# Altium PCB LSS-P-PCB-S v1.1.PcbDoc
Units mil, origin at the board's own origin, x right, y up, seen from the top; angles counter-clockwise.
Board outline 571.53 x 787.66 mil, 2 copper layers (Top Layer, Bottom Layer), stack 57 mil thick; 2 components, 4 nets, 16 pads, 5 vias.
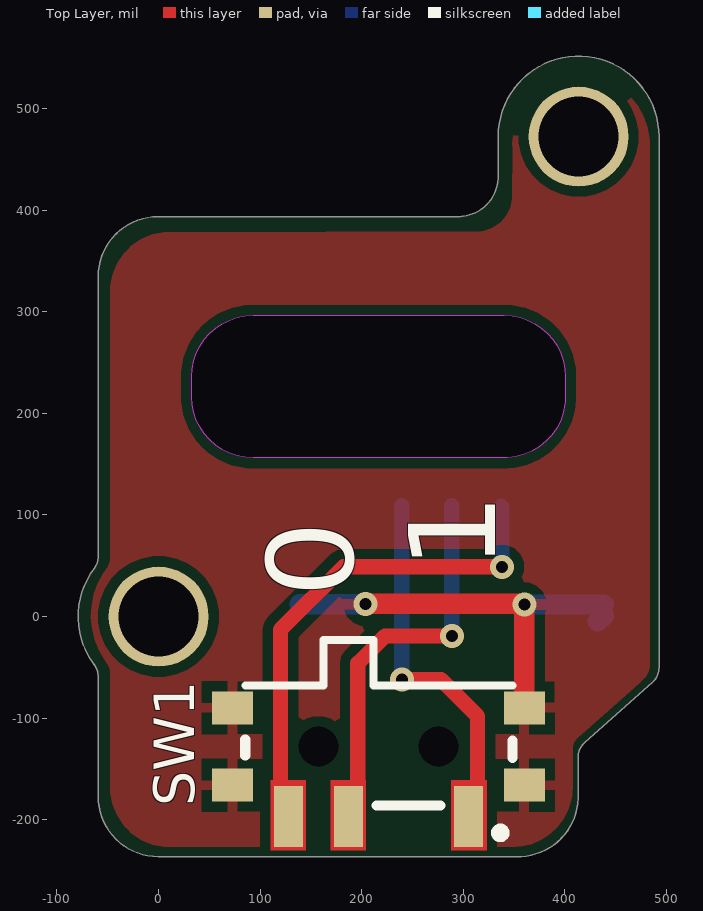
[diagram p0: Top Layer view]
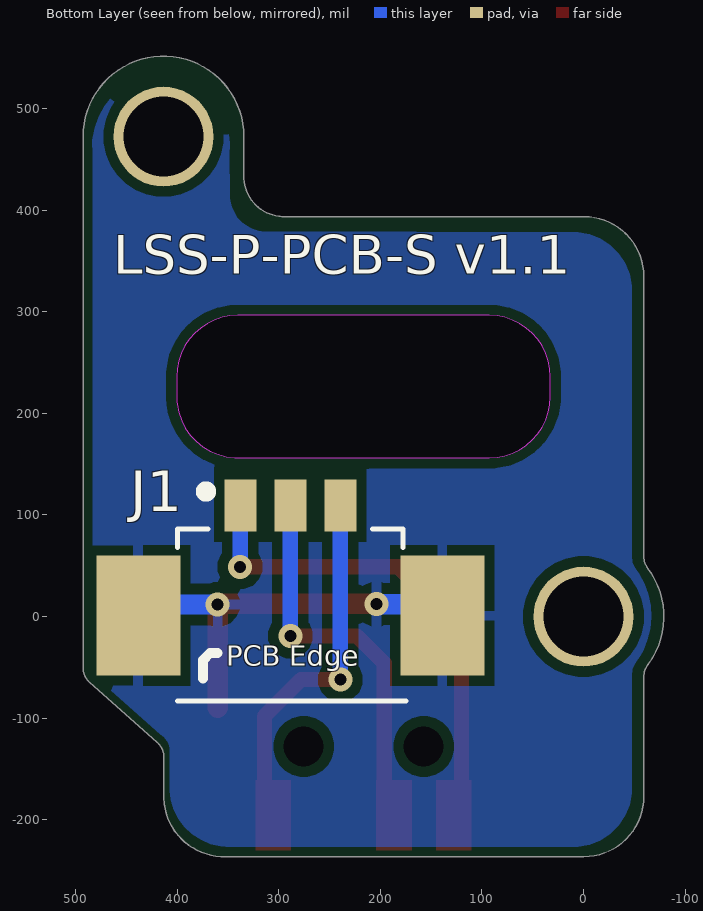
[diagram p1: Bottom Layer view, seen from below]

## Layer stack, top to bottom
Top Solder: solder mask 3, Solder Resist, Dk 3.5
Top Layer: signal copper 10
Dielectric 1: dielectric 37, FR-4, Dk 4.8
Bottom Layer: signal copper 10
Bottom Solder: solder mask 3, Solder Resist, Dk 3.5

## Board outline
-59.44,-177.16 -59.44,-59.18 ccw(c-79.14,-59.18) -63.36,-47.39 cw(c0.26,0.21) -68.22,-40.1 cw(c0.01,0) -63.36,47.4 ccw(c-79.14,59.2) -59.44,59.19 -59.44,334.65 cw(c-0.38,334.65) -42.15,376.41 cw(c-0.39,334.65) -0.39,393.71 294.89,393.71 ccw(c294.89,433.72) 296.96,393.76 ccw(c294.91,433.3) 299.7,394 ccw(c294.88,433.08) 334.21,431.07 ccw(c294.41,433.07) 334.26,433.08 334.26,472.45 cw(c413.39,472.45) 373.82,540.98 cw(c413.39,472.46) 452.96,540.98 cw(c413.39,472.45) 492.53,472.45 492.53,-50.2 cw(c472.85,-50.2) 485.9,-64.92 419.62,-123.74 ccw(c432.69,-138.47) 413,-138.47 413,-177.16 cw(c353.13,-177.16) 412.92,-180.27 cw(c353.58,-177.19) 412.56,-184.38 cw(c353.93,-177.14) 356.96,-236.14 cw(c353.95,-176.24) 353.94,-236.21 -0.39,-236.21 cw(c-0.39,-177.15) -42.15,-218.92 cw(c-0.38,-177.16)
cut-out: 50.32,173.95 cw(c92.93,216.54) 32.68,216.54 32.68,236.23 cw(c92.93,236.22) 50.32,278.82 cw(c92.92,236.22) 92.92,296.46 340.16,296.46 cw(c340.16,236.22) 382.76,278.82 cw(c340.15,236.22) 400.4,236.23 400.4,216.54 cw(c339.33,216.53) 400.32,213.37 cw(c339.87,216.5) 399.95,209.17 cw(c340.16,216.56) 343.24,156.38 cw(c340.17,217.49) 340.16,156.31 92.92,156.31 cw(c92.92,216.54)

## Design rules (kind name [scope] priority, off if disabled: settings)
Clearance [All] p1: gap=10 ignorepadtopadclearanceinfootprint=FALSE except(0: Arc-Hole Track-Hole SMDPad-Hole THPad-Hole Via-Hole Fill-Hole Poly-Hole Region-Hole Text-Hole)
MinimumSolderMaskSliver [All] p1: minsoldermaskwidth=0
PolygonConnect [All] p1: connectstyle=Relief reliefconductorwidth=10 reliefentries=4 polygonreliefangle="90 Angle" airgapwidth=10
RoutingVias [All] p1: holewidth=11.81 width=23.62 viastyle="Through Hole" minholewidth=11.81 minwidth=23.62 maxholewidth=11.81 maxwidth=23.62
SilkToSilkClearance [All] p1: silktosilkclearance=0
SilkToSolderMaskClearance [IsPad] p1: minsilkscreentomaskgap=0 clearancetoexposedcopper=TRUE
SolderMaskExpansion [All] p1: expansion=4 istentingtop=FALSE
Width [All] p1: maxlimit=20 minlimit=10 preferedwidth=10 minimp=50.000000 maximp=50.000000 favimp=50.000000
27 further rules are at their usual default settings.

## Components (designator, comment, footprint, x,y, rotation, side; value= is the part's Value field where it differs from the comment)
J1 "0532610371" 0532610371 288.54,55.12 r180 bottom locked
SW1 "PCM12SMTR" PCM12SMTR_ 216.34,-127.87 r180 top locked

## Footprints (in the part's own frame and the unit in brackets; to place one, negate y for a bottom-side part, rotate by r counter-clockwise, add the part's x,y. Pads: shape width x height; smd on the part's side, far side on the other; paste and mask are expansions set on the pad)
0532610371 [mm]
  rect 0.8x1.3 smd: 1(-1.25,1.375) 2(0,1.375) 3(1.25,1.375)
  rect 2.1x3 smd: MP1(3.8,-1.375) MP2(-3.8,-1.375)
  silkscreen extent -2.82,-3.51 2.9,1.85, body extent -4.45,-3.49 4.45,1.71, height 3.6
PCM12SMTR_ [mm] "SWITCH SLIDE SPDT 300MA 6V"
  rect 0.72x1.52 smd: 1(-2.25,1.75) 2(0.75,1.75) 3(2.25,1.75)
  round 0 hole 1 unplated: MH(-1.5,0) MH(1.5,0)
  rect 1.02x0.82 smd: MP(-3.65,-0.965) MP(-3.65,0.965) MP(3.65,-0.965) MP(3.65,0.965)
  silkscreen extent -3.35,-2.67 3.33,2.26, body extent -3.85,-2.8 3.85,2.2, height 1.4

## Part data
J1: "CONN HEADER SMD R/A 3POS 1.25MM", Manufacturer=Molex, Manufacturer Part Number=53261-0371, Supplier Part Number=538-53261-0371, Category="Headers and Wire Housings", Item Type="Right Angle JST", Pricing="1=0.69, 10=0.582, 50=0.582, 100=0.452, 1000=0.359, 10000=0.275 (USD)", RoHS=Yes, Stock=46452, Supplier=Mouser
SW1: "SWITCH SLIDE SPDT 300MA 6V", Contact Current Rating=300mA, Contact Resistance=70mR, Insulation Resistance=100mR, Manufacturer="ITT C&K", Max Operating Temperature=85°C, Max Voltage Rating (DC)=6V, Min Operating Temperature=-20°C, Package Quantity=1, Supplier Part Number 1=401-2016-1-ND, Actuator Length=1.5mm, Actuator Material=Nylon,Polyamide, Actuator Type=Standard, ComponentLink1Description=https://www.ckswitches.com/media/1424/pcm.pdf?src-supplier=Digi-Key, ComponentLink1URL=https://www.ckswitches.com/media/1424/pcm.pdf?src-supplier=Digi-Key, ComponentLink2Description=https://products.avnet.com/shop/en/asia/switches-and-relays/switches/slide-switch/www.ckswitches.com/media/1424/pcm.pdf?src-supplier=Avnet+Asia, ComponentLink2URL=https://products.avnet.com/shop/en/asia/switches-and-relays/switches/slide-switch/www.ckswitches.com/media/1424/pcm.pdf?src-supplier=Avnet+Asia, ComponentLink3Description=http://www1.futureelectronics.com/doc/C%20&%20K%20COMPONENTS/PCM12SMTR.pdf?src-supplier=Future+Electronics, ComponentLink3URL=http://www1.futureelectronics.com/doc/C%20&%20K%20COMPONENTS/PCM12SMTR.pdf?src-supplier=Future+Electronics, ComponentLink4Description=http://www.farnell.com/datasheets/1789487.pdf?src-supplier=Onlinecomponents.com, ComponentLink4URL=http://www.farnell.com/datasheets/1789487.pdf?src-supplier=Onlinecomponents.com, ComponentLink5Description=http://www.farnell.com/datasheets/1789487.pdf?src-supplier=Element14, ComponentLink5URL=http://www.farnell.com/datasheets/1789487.pdf?src-supplier=Element14, ComponentLink6Description=http://www.farnell.com/datasheets/1789487.pdf?src-supplier=Mouser, ComponentLink6URL=http://www.farnell.com/datasheets/1789487.pdf?src-supplier=Mouser, Contact Material="Copper Alloy,Copper,Silver", Contact Plating=Silver, Current Rating=300mA, Depth=5mm, Item Type="Slide Switch", Lead Free="Lead Free", Length=7.7mm, Manufacturer Part Number=PCM12SMTR, Max Current Rating=300mA, Mechanical Life=10000Cycles, Mount="Surface Mount", Orientation="Right Angle", Packaging="Tape and Reel", Pricing 1="1=0.91, 10=0.87, 25=0.8524, 50=0.7616, 100=0.7253, 250=0.7072, 500=0.5984, 1000=0.58027 (USD)", REACH SVHC="No SVHC", Stock 1=33578, Supplier 1=Digi-Key, Switch Function=On-On, Switch Travel=1.5mm, Termination="Gull Wing", Throw Configuration=SPDT, Voltage Rating (AC)=6V, Voltage Rating (DC)=6V, Width=6.7mm

## Free pads (board coordinates)
  round 98.43 hole 78.76 unplated: MH(0,0)
  round 98.43 hole 78.74 unplated: MH(413.39,472.44)

## Via types
v1: diameter 23.62, hole 11.81, Top Layer to Bottom Layer, 3 vias
v2: diameter 23.62, hole 11.81, Top Layer to Bottom Layer, tented both sides, 2 vias

## Nets (pads, with @x,y where several pads share a name; then routed paths per layer and width w, separated by ;. In a path a pad name is that pad's centre, name@x,y a point inside that pad or via, vN(x,y) a via of type N, cw(c..) or ccw(c..) an arc to the next point about the centre after c; other vN are vias at no path point)
GND: J1.MP1 J1.MP2 SW1.MP | length 408.3
  Top Layer w20: v1@204.27,12.77 358.28,12.77 358.37,12.68 359.16,12.68 v1@359.26,12.77 ; SW1.MP@360.04,-89.88 v1(360.04,11.98)
  Bottom Layer w20: J1.MP1@138.66,12.26 v1(203.76,12.26) ; v1(360.04,11.98) J1.MP2@438.15,11.98 ; J1.MP2@432.38,-4.78 J1.MP2
NetJ1_1: J1.1 SW1.3 | length 466.9
  Top Layer w15: SW1.3@121.08,-190.1 SW1.3 ; 121.08,-166.55 120.1,-165.56 120.1,-12.9 182,49 v2(338,49)
  Bottom Layer w15: J1.1@337,108.5 337.88,107.62 337.88,49.12 v2(338,49)
NetJ1_2: J1.2 SW1.2 | length 387.9
  Top Layer w15: SW1.2 186.81,-181.02 193.48,-174.35 193.48,-168.08 196,-165.56 196,-46 222.96,-19.04 v1(288.54,-19.04)
  Bottom Layer w15: J1.2 v1(288.54,-19.04) 288.54,-19.23 v1@289.31,-20
NetJ1_3: J1.3 SW1.1 | length 350.5
  Top Layer w15: v2(239.33,-62.02) 278.02,-62.02 314,-98 314,-165.56 ; SW1.1@311.59,-190.1 SW1.1@311.59,-167.97
  Bottom Layer w15: v2(239.33,-62.02) J1.3
pads on no net: SW1.MH

## Polygon pours and split planes (outlines as drawn)
GND on Top Layer "Top Layer-GND" (solid, remove dead copper, pour order 1): -47.6,-55.54 ccw(c-63.97,-55.54) -50.84,-45.76 ccw(c-52.77,-47.19) -50.86,-45.74 cw(c11.68,1.04) -55.63,-38.57 cw(c-54.03,-37.64) -55.64,-38.55 cw(c11.46,0.86) -50.87,47.45 cw(c-22.31,26.11) -50.86,47.47 ccw(c-63.97,57.27) -47.6,57.27 cw(c-45.16,57.27) -47.6,57.3 -47.6,319.78 cw(c11.08,319.78) -30.41,361.27 cw(c-29.92,360.79) -30.4,361.28 cw(c11.08,319.77) 11.08,378.45 cw(c11.08,376.06) 12.28,378.13 317.43,379.36 ccw(c312.98,414.21) 348.07,412.37 348.6,459.56 cw(c351,460.29) 348.49,460.18 cw(c419.74,463.19) 399.51,531.58 cw(c401.15,529.67) 400.71,532.14 cw(c415.04,451.67) 403.04,532.52 cw(c419.71,463.31) 405.29,533.03 cw(c405.8,530.56) 406.54,532.97 cw(c415.03,451.77) 426.82,532.55 cw(c426.46,530.06) 427.48,532.36 cw(c412.08,462.73) 483.4,462.73 cw(c412.09,462.73) 483.33,459.72 cw(c480.82,459.82) 483.22,459.06 483.22,-46.98 cw(c462.07,-46.98) 476.12,-62.79 cw(c473.04,-59.33) 476.1,-62.81 ccw(c475.69,-62.32) 476.12,-62.79 476.1,-62.81 412.95,-118.84 cw(c411.82,-117.6) 412.93,-118.86 ccw(c423.79,-131.1) 407.43,-130.87 cw(c405.18,-131.71) 407.58,-131.71 407.58,-170.97 cw(c405.18,-170.97) 407.28,-172.13 cw(c348.59,-168.02) 407,-175.12 cw(c404.79,-174.86) 406.99,-175.15 ccw(c406.02,-175.01) 407,-175.12 406.99,-175.15 cw(c348.74,-167.96) 352.13,-226.55 cw(c351.46,-224.25) 351.46,-226.65 11.08,-226.65 cw(c11.08,-167.97) -30.4,-209.48 cw(c-29.25,-208.32) -30.41,-209.47 ccw(c-7.96,-187.17) -30.4,-209.48 -30.41,-209.47 cw(c11.08,-167.98) -47.6,-167.97 cw(c-45.2,-167.97) -47.6,-167.94
GND on Bottom Layer "Bottom Layer-GND" (solid, remove dead copper, pour order 0): -47.73,-55.54 ccw(c-64.1,-55.54) -50.98,-45.76 ccw(c-52.91,-47.19) -50.99,-45.74 cw(c11.54,1.04) -55.76,-38.57 cw(c-54.17,-37.64) -55.78,-38.55 cw(c11.33,0.86) -51,47.45 cw(c-22.44,26.11) -50.99,47.47 ccw(c-64.1,57.27) -47.73,57.27 cw(c-45.29,57.27) -47.73,57.3 -47.73,319.78 cw(c10.95,319.78) -30.55,361.27 cw(c-30.05,360.79) -30.53,361.28 cw(c10.94,319.77) 10.95,378.45 cw(c10.95,376.06) 12.14,378.13 317.3,379.36 ccw(c312.85,414.21) 347.93,412.37 348.46,459.56 cw(c350.87,460.29) 348.36,460.18 cw(c419.6,463.19) 399.38,531.58 cw(c401.01,529.67) 400.57,532.14 cw(c414.91,451.67) 402.9,532.52 cw(c419.58,463.31) 405.16,533.03 cw(c405.67,530.56) 406.41,532.97 cw(c414.9,451.77) 426.69,532.55 cw(c426.32,530.06) 427.35,532.36 cw(c411.95,462.73) 483.26,462.73 cw(c411.95,462.73) 483.2,459.72 cw(c480.69,459.82) 483.08,459.06 483.08,-46.98 cw(c461.93,-46.98) 475.98,-62.79 cw(c472.9,-59.33) 475.97,-62.81 ccw(c475.55,-62.32) 475.98,-62.79 475.97,-62.81 412.82,-118.84 cw(c411.69,-117.6) 412.8,-118.86 ccw(c423.66,-131.1) 407.3,-130.87 cw(c405.05,-131.71) 407.45,-131.71 407.45,-170.97 cw(c405.05,-170.97) 407.15,-172.13 cw(c348.46,-168.02) 406.86,-175.12 cw(c404.66,-174.86) 406.86,-175.15 ccw(c405.89,-175.01) 406.86,-175.12 406.86,-175.15 cw(c348.61,-167.96) 352,-226.55 cw(c351.33,-224.25) 351.33,-226.65 10.94,-226.65 cw(c10.94,-167.97) -30.53,-209.48 cw(c-29.38,-208.32) -30.55,-209.47 ccw(c-8.09,-187.17) -30.53,-209.48 -30.55,-209.47 cw(c10.95,-167.98) -47.73,-167.97 cw(c-45.33,-167.97) -47.73,-167.94

## Other copper
Top Layer:
  rectangle net NetJ1_3: 288,-230 323,-161
  rectangle net NetJ1_1: 110,-230 145,-161
  rectangle net NetJ1_2: 169,-230 204,-161

## Silkscreen, mask and mechanical layers (free items; w line width, h text height)
Top Overlay:
  text "1" at 331.41,46.28 h86 r90
  text "0" at 191.77,19.13 h86 r90
Bottom Overlay:
  text "LSS-P-PCB-S v1.1" at 463,324.78 h65
Board_Outline:
  lines w5: -68.37,-40.1 ccw(c0.1,0.2) -63.52,-47.39 cw(c-79.29,-59.18) -59.6,-59.18 -59.6,-177.16 ccw(c-0.54,-177.16) -42.3,-218.92 ccw(c-0.54,-177.15) -0.54,-236.21 353.79,-236.21 ccw(c353.79,-176.19) 356.81,-236.14 ccw(c353.78,-177.14) 412.41,-184.38 ccw(c353.45,-177.19) 412.77,-180.27 ccw(c352.83,-177.16) 412.85,-177.16 412.85,-138.47 cw(c432.53,-138.47) 419.46,-123.74 485.75,-64.92 ccw(c472.7,-50.2) 492.37,-50.2 492.37,472.45 ccw(c413.24,472.45) 452.81,540.98 ccw(c413.24,472.46) 373.67,540.98 ccw(c413.24,472.45) 334.11,472.45 334.11,433.08 cw(c294.08,433.08) 334.06,431.07 cw(c294.73,433.08) 299.55,394 cw(c294.76,433.31) 296.81,393.76 cw(c294.74,433.72) 294.74,393.71 -0.54,393.71 ccw(c-0.54,334.65) -42.3,376.41 ccw(c-0.54,334.65) -59.6,334.65 -59.6,59.19 cw(c-79.29,59.2) -63.52,47.4 ccw(c-0.14,0) -68.37,-40.1 ; 32.53,216.54 ccw(c92.78,216.54) 50.17,173.95 ccw(c92.77,216.55) 92.77,156.31 340.01,156.31 ccw(c340.01,217.54) 343.09,156.38 ccw(c340,216.56) 399.8,209.17 ccw(c339.66,216.51) 400.17,213.37 ccw(c339.03,216.54) 400.25,216.54 400.25,236.23 ccw(c340,236.22) 382.61,278.82 ccw(c340.01,236.22) 340.01,296.46 92.77,296.46 ccw(c92.77,236.22) 50.17,278.82 ccw(c92.78,236.22) 32.53,236.23 32.53,216.54
Fabrication:
  drawing of 191 lines, arcs and shapes, not listed
  text "Layer" at 1017.88,491.68 h60
  text "Name" at 1427.79,491.68 h60
  text "Material" at 2357.54,491.68 h60
  text "Thickness" at 3217.3,491.68 h60
  text "Constant" at 3867.14,491.68 h60
  text "Board Layer Stack" at 4437,491.68 h60
  text "Top Overlay" at 1427.79,371.68 h60
  text "Top Solder" at 1427.79,251.68 h60
  text "Solder Resist" at 2357.54,251.68 h60
  text "3.00mil" at 3217.3,251.68 h60
  text "3.5" at 3867.14,251.68 h60
  text "1" at 1017.88,131.68 h60
  text "Top Layer" at 1427.79,131.68 h60
  text "10.00mil" at 3217.3,131.68 h60
  text "Dielectric 1" at 1427.79,11.68 h60
  text "FR-4" at 2357.54,11.68 h60
  text "37.00mil" at 3217.3,11.68 h60
  text "4.8" at 3867.14,11.68 h60
  text "2" at 1017.88,-108.32 h60
  text "Bottom Layer" at 1427.79,-108.32 h60
  text "10.00mil" at 3217.3,-108.32 h60
  text "Bottom Solder" at 1427.79,-228.32 h60
  text "Solder Resist" at 2357.54,-228.32 h60
  text "3.00mil" at 3217.3,-228.32 h60
  text "3.5" at 3867.14,-228.32 h60
  text "Bottom Overlay" at 1427.79,-348.32 h60
  text "Total board thickness:" at 1017.88,-468.32 h60
  text "63.00mil" at 3217.3,-468.32 h60
  text "Note: 1oz Copper Weight is Recommended for this PCB." at 973,-724.13 h100
Drill Drawing:
  circle w10: c-23.63,1452.33 r33.33
  lines w10: -56.96,1035.67 9.7,1035.67 -23.63,969 -56.96,1035.67 ; -56.96,1119 9.7,1119 9.7,1185.67 -56.96,1185.67 -56.96,1119 ; -56.96,1285.67 -40.3,1285.67 -23.63,1269 -6.96,1285.67 9.7,1285.67 -6.96,1302.33 9.7,1319 -6.96,1319 -23.63,1335.67 -40.3,1319 -56.96,1319 -40.3,1302.33 -56.96,1285.67
  lines w15: -116.76,924 6903.34,924 ; -116.76,1524 6903.34,1524 ; 434.12,774 434.12,1674 ; 914,774 914,1674 ; 2013.68,774 2013.68,1674 ; 2519.56,774 2519.56,1674 ; 3253.36,774 3253.36,1674 ; 4752.91,774 4752.91,1674 ; 5342.76,774 5342.76,1674 ; 6088.55,774 6088.55,1674 ; -116.76,774 6903.34,774 6903.34,1674 -116.76,1674 -116.76,774
  text "Symbol" at -26.76,1569 h72
  text "Count" at 479.12,1569 h72
  text "Hole Size" at 959,1569 h72
  text "Plated" at 2058.68,1569 h72
  text "Hole Type" at 2564.56,1569 h72
  text "Drill Layer Pair" at 3298.36,1569 h72
  text "Via/Pad" at 4797.91,1569 h72
  text "Pad Shape" at 5387.76,1569 h72
  text "Template" at 6133.55,1569 h72
  text "1" at 479.12,1419 h60
  text "2.000mm (78.74mil)" at 959,1419 h60
  text "NPTH" at 2058.68,1419 h60
  text "Round" at 2564.56,1419 h60
  text "Top Layer - Bottom Layer" at 3298.36,1419 h60
  text "Pad" at 4797.91,1419 h60
  text "Rounded" at 5387.76,1419 h60
  text "c250hn200" at 6133.55,1419 h60
  text "1" at 479.12,1269 h60
  text "2.000mm (78.76mil)" at 959,1269 h60
  text "NPTH" at 2058.68,1269 h60
  text "Round" at 2564.56,1269 h60
  text "Top Layer - Bottom Layer" at 3298.36,1269 h60
  text "Pad" at 4797.91,1269 h60
  text "Rounded" at 5387.76,1269 h60
  text "c250hn200(1)" at 6133.55,1269 h60
  text "2" at 479.12,1119 h60
  text "1.000mm (39.37mil)" at 959,1119 h60
  text "NPTH" at 2058.68,1119 h60
  text "Round" at 2564.56,1119 h60
  text "Top Layer - Bottom Layer" at 3298.36,1119 h60
  text "Pad" at 4797.91,1119 h60
  text "Rounded" at 5387.76,1119 h60
  text "c0hn100" at 6133.55,1119 h60
  text "5" at 479.12,969 h60
  text "0.300mm (11.81mil)" at 959,969 h60
  text "PTH" at 2058.68,969 h60
  text "Round" at 2564.56,969 h60
  text "Top Layer - Bottom Layer" at 3298.36,969 h60
  text "Via" at 4797.91,969 h60
  text "Rounded" at 5387.76,969 h60
  text "(Mixed)" at 6133.55,969 h60
  text "9 Total" at 479.12,819 h60

## Text inside footprints (layer, text, board x,y; h text height)
J1: Bottom Overlay "PCB Edge" at 351.54,-48.32 h19.68